# Altium PCB PCB_CONTROL.PcbDoc (part 6 of 15)
Units mil, origin at the board's own origin, x right, y up, seen from the top; angles counter-clockwise.
Board outline 7360.03 x 4773.15 mil, 2 copper layers (Top Layer, Bottom Layer); 73 components, 135 nets, 396 pads, 106 vias.
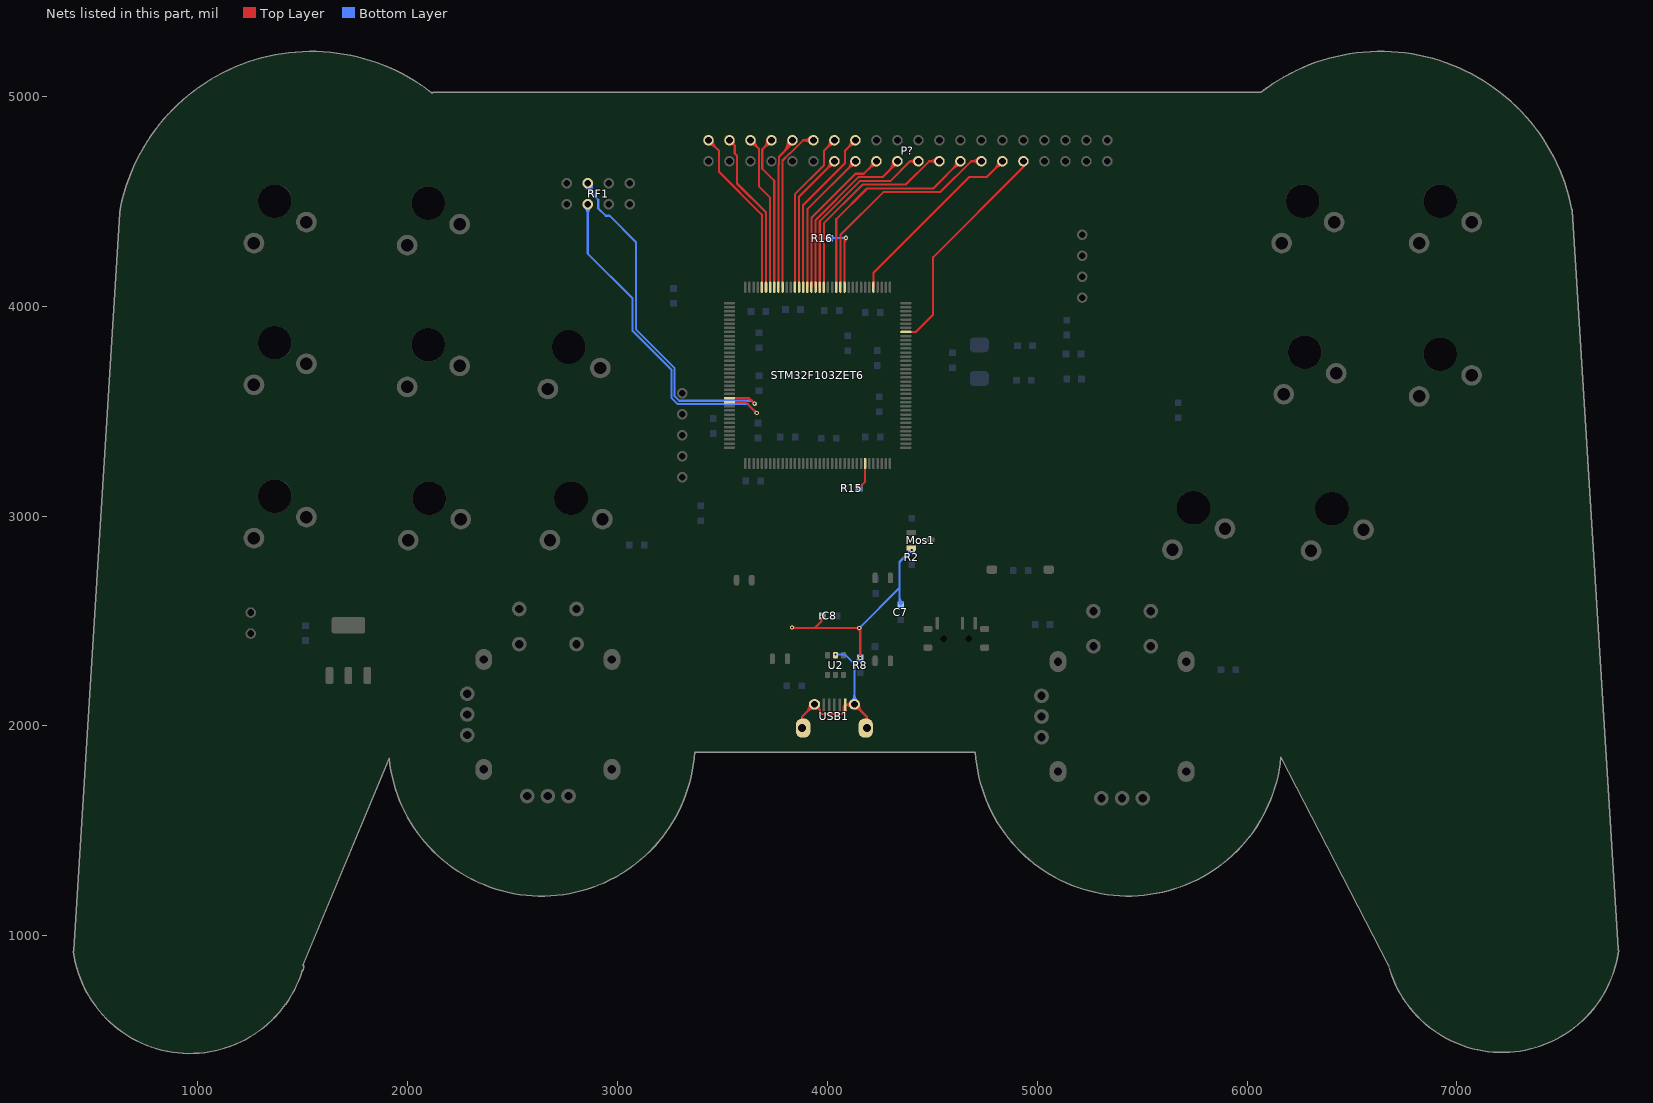
[diagram p6: the nets of this part, all layers, seen from the top]

## Via types
v1: diameter 20, hole 10, Top Layer to Bottom Layer, 104 vias
v2: diameter 30, hole 20, Top Layer to Bottom Layer, 2 vias

## Nets (pads, with @x,y where several pads share a name; then routed paths per layer and width w, separated by ;. In a path a pad name is that pad's centre, name@x,y a point inside that pad or via, vN(x,y) a via of type N, cw(c..) or ccw(c..) an arc to the next point about the centre after c; other vN are vias at no path point) (continued)
BGND: (continued)
  Bottom Layer w10: v1(4040,2340) 4086,2340 4130,2296 ; USB1.0@4130,2103 4130,2296 ; v1(4153,2466) 4345,2658 ; C7.2@4351,2578 4345,2584 4345,2658 ; v1@4043.54,2336.46 cw(c4052.07,2327.93) 4052.07,2340 ; v1@4043.54,2336.46 cw(c4052.07,2327.93) 4052.07,2340 ; v1@4043.54,2336.46 cw(c4052.07,2327.93) 4052.07,2340 ; v1@4043.54,2336.46 cw(c4052.07,2327.93) 4052.07,2340 ; v1@4043.54,2336.46 cw(c4052.07,2327.93) 4052.07,2340 ; v1@4043.54,2336.46 cw(c4052.07,2327.93) 4052.07,2340 ; v1@4043.54,2336.46 cw(c4052.07,2327.93) 4052.07,2340 ; v1@4043.54,2336.46 cw(c4052.07,2327.93) 4052.07,2340 ; v1@4043.54,2336.46 cw(c4052.07,2327.93) 4052.07,2340 ; v1@4043.54,2336.46 cw(c4052.07,2327.93) 4052.07,2340 ; v1@4043.54,2343.54 ccw(c4052.07,2352.07) 4052.07,2340 ; v1@4043.54,2343.54 ccw(c4052.07,2352.07) 4052.07,2340 ; v1@4043.54,2343.54 ccw(c4052.07,2352.07) 4052.07,2340 ; v1@4043.54,2343.54 ccw(c4052.07,2352.07) 4052.07,2340 ; v1@4043.54,2343.54 ccw(c4052.07,2352.07) 4052.07,2340 ; v1@4043.54,2343.54 ccw(c4052.07,2352.07) 4052.07,2340 ; v1@4043.54,2343.54 ccw(c4052.07,2352.07) 4052.07,2340 ; v1@4043.54,2343.54 ccw(c4052.07,2352.07) 4052.07,2340 ; v1@4043.54,2343.54 ccw(c4052.07,2352.07) 4052.07,2340 ; v1@4043.54,2343.54 ccw(c4052.07,2352.07) 4052.07,2340 ; USB1.0@4115.86,2117.14 ccw(c4081.72,2151.28) 4130,2151.28 ; USB1.0@4115.86,2117.14 ccw(c4081.72,2151.28) 4130,2151.28 ; USB1.0@4115.86,2117.14 ccw(c4081.72,2151.28) 4130,2151.28 ; USB1.0@4115.86,2117.14 ccw(c4081.72,2151.28) 4130,2151.28 ; USB1.0@4115.86,2117.14 ccw(c4081.72,2151.28) 4130,2151.28 ; USB1.0@4115.86,2117.14 ccw(c4081.72,2151.28) 4130,2151.28 ; USB1.0@4115.86,2117.14 ccw(c4081.72,2151.28) 4130,2151.28 ; USB1.0@4115.86,2117.14 ccw(c4081.72,2151.28) 4130,2151.28 ; 4130,2151.28 ccw(c4178.28,2151.28) USB1.0@4144.14,2117.14 ; 4130,2151.28 ccw(c4178.28,2151.28) USB1.0@4144.14,2117.14 ; 4130,2151.28 ccw(c4178.28,2151.28) USB1.0@4144.14,2117.14 ; 4130,2151.28 ccw(c4178.28,2151.28) USB1.0@4144.14,2117.14 ; 4130,2151.28 ccw(c4178.28,2151.28) USB1.0@4144.14,2117.14 ; 4130,2151.28 ccw(c4178.28,2151.28) USB1.0@4144.14,2117.14 ; 4130,2151.28 ccw(c4178.28,2151.28) USB1.0@4144.14,2117.14 ; 4130,2151.28 ccw(c4178.28,2151.28) USB1.0@4144.14,2117.14 ; 4130,2296 v1(4158,2324) ; 4130,2296 v1(4158,2324) ; 4130,2296 v1(4158,2324) ; 4130,2296 v1(4158,2324) ; 4139.22,2305.22 cw(c4158,2286.44) R8.2@4158,2313 ; 4139.22,2305.22 ccw(c4120.44,2324) R8.2@4147,2324 ; 4139.22,2305.22 cw(c4158,2286.44) R8.2@4158,2313 ; 4139.22,2305.22 ccw(c4120.44,2324) R8.2@4147,2324 ; 4139.22,2305.22 cw(c4158,2286.44) R8.2@4158,2313 ; 4139.22,2305.22 ccw(c4120.44,2324) R8.2@4147,2324 ; 4139.22,2305.22 cw(c4158,2286.44) R8.2@4158,2313 ; 4139.22,2305.22 ccw(c4120.44,2324) R8.2@4147,2324 ; 4139.22,2305.22 ccw(c4120.44,2324) R8.2@4147,2324 ; 4139.22,2305.22 cw(c4158,2286.44) R8.2@4158,2313 ; 4139.22,2305.22 ccw(c4120.44,2324) R8.2@4147,2324 ; 4139.22,2305.22 cw(c4158,2286.44) R8.2@4158,2313 ; 4139.22,2305.22 ccw(c4120.44,2324) R8.2@4147,2324 ; 4139.22,2305.22 cw(c4158,2286.44) R8.2@4158,2313 ; 4139.22,2305.22 ccw(c4120.44,2324) R8.2@4147,2324 ; 4139.22,2305.22 cw(c4158,2286.44) R8.2@4158,2313 ; 4139.22,2305.22 ccw(c4120.44,2324) R8.2@4147,2324 ; 4139.22,2305.22 cw(c4158,2286.44) R8.2@4158,2313 ; 4139.22,2305.22 ccw(c4120.44,2324) R8.2@4147,2324 ; 4139.22,2305.22 cw(c4158,2286.44) R8.2@4158,2313 ; 4139.22,2305.22 ccw(c4120.44,2324) R8.2@4147,2324 ; 4139.22,2305.22 cw(c4158,2286.44) R8.2@4158,2313 ; 4139.22,2305.22 ccw(c4120.44,2324) R8.2@4147,2324 ; 4139.22,2305.22 cw(c4158,2286.44) R8.2@4158,2313 ; 4139.22,2305.22 ccw(c4120.44,2324) R8.2@4147,2324 ; 4139.22,2305.22 cw(c4158,2286.44) R8.2@4158,2313 ; 4139.22,2305.22 ccw(c4120.44,2324) R8.2@4147,2324 ; 4139.22,2305.22 cw(c4158,2286.44) R8.2@4158,2313 ; 4139.22,2305.22 ccw(c4120.44,2324) R8.2@4147,2324 ; 4139.22,2305.22 cw(c4158,2286.44) R8.2@4158,2313 ; 4139.22,2305.22 ccw(c4120.44,2324) R8.2@4147,2324 ; 4139.22,2305.22 cw(c4158,2286.44) R8.2@4158,2313 ; 4139.22,2305.22 ccw(c4120.44,2324) R8.2@4147,2324 ; 4139.22,2305.22 cw(c4158,2286.44) R8.2@4158,2313 ; 4139.22,2305.22 ccw(c4120.44,2324) R8.2@4147,2324 ; 4139.22,2305.22 cw(c4158,2286.44) R8.2@4158,2313 ; 4139.22,2305.22 ccw(c4120.44,2324) R8.2@4147,2324 ; 4139.22,2305.22 cw(c4158,2286.44) R8.2@4158,2313 ; 4139.22,2305.22 ccw(c4120.44,2324) R8.2@4147,2324 ; 4139.22,2305.22 cw(c4158,2286.44) R8.2@4158,2313 ; 4139.22,2305.22 ccw(c4120.44,2324) R8.2@4147,2324 ; 4139.22,2305.22 cw(c4158,2286.44) R8.2@4158,2313 ; 4139.22,2305.22 ccw(c4120.44,2324) R8.2@4147,2324 ; 4139.22,2305.22 cw(c4158,2286.44) R8.2@4158,2313 ; 4139.22,2305.22 ccw(c4120.44,2324) R8.2@4147,2324 ; 4139.22,2305.22 cw(c4158,2286.44) R8.2@4158,2313 ; 4139.22,2305.22 ccw(c4120.44,2324) R8.2@4147,2324 ; 4139.22,2305.22 cw(c4158,2286.44) R8.2@4158,2313 ; 4139.22,2305.22 ccw(c4120.44,2324) R8.2@4147,2324 ; 4139.22,2305.22 cw(c4158,2286.44) R8.2@4158,2313 ; 4139.22,2305.22 ccw(c4120.44,2324) R8.2@4147,2324 ; 4139.22,2305.22 cw(c4158,2286.44) R8.2@4158,2313 ; 4139.22,2305.22 ccw(c4120.44,2324) R8.2@4147,2324 ; 4139.22,2305.22 cw(c4158,2286.44) R8.2@4158,2313 ; 4139.22,2305.22 ccw(c4120.44,2324) R8.2@4147,2324 ; 4139.22,2305.22 cw(c4158,2286.44) R8.2@4158,2313 ; 4139.22,2305.22 ccw(c4120.44,2324) R8.2@4147,2324 ; 4139.22,2305.22 cw(c4158,2286.44) R8.2@4158,2313 ; 4139.22,2305.22 ccw(c4120.44,2324) R8.2@4147,2324 ; 4139.22,2305.22 cw(c4158,2286.44) R8.2@4158,2313 ; 4139.22,2305.22 ccw(c4120.44,2324) R8.2@4147,2324 ; 4139.22,2305.22 cw(c4158,2286.44) R8.2@4158,2313 ; 4139.22,2305.22 ccw(c4120.44,2324) R8.2@4147,2324 ; 4139.22,2305.22 cw(c4158,2286.44) R8.2@4158,2313 ; R8.2@4149.46,2315.46 cw(c4158,2306.93) R8.2@4158,2319 ; R8.2@4149.46,2315.46 ccw(c4140.93,2324) R8.2@4153,2324 ; R8.2@4149.46,2315.46 cw(c4158,2306.93) R8.2@4158,2319 ; R8.2@4149.46,2315.46 ccw(c4140.93,2324) R8.2@4153,2324 ; R8.2@4149.46,2315.46 cw(c4158,2306.93) R8.2@4158,2319 ; R8.2@4149.46,2315.46 ccw(c4140.93,2324) R8.2@4153,2324 ; R8.2@4149.46,2315.46 cw(c4158,2306.93) R8.2@4158,2319 ; R8.2@4149.46,2315.46 ccw(c4140.93,2324) R8.2@4153,2324 ; R8.2@4149.46,2315.46 ccw(c4140.93,2324) R8.2@4153,2324 ; R8.2@4149.46,2315.46 cw(c4158,2306.93) R8.2@4158,2319 ; R8.2@4149.46,2315.46 ccw(c4140.93,2324) R8.2@4153,2324 ; R8.2@4149.46,2315.46 cw(c4158,2306.93) R8.2@4158,2319 ; R8.2@4149.46,2315.46 ccw(c4140.93,2324) R8.2@4153,2324 ; R8.2@4149.46,2315.46 cw(c4158,2306.93) R8.2@4158,2319 ; R8.2@4149.46,2315.46 ccw(c4140.93,2324) R8.2@4153,2324 ; R8.2@4149.46,2315.46 cw(c4158,2306.93) R8.2@4158,2319 ; R8.2@4149.46,2315.46 ccw(c4140.93,2324) R8.2@4153,2324 ; R8.2@4149.46,2315.46 cw(c4158,2306.93) R8.2@4158,2319 ; R8.2@4149.46,2315.46 ccw(c4140.93,2324) R8.2@4153,2324 ; R8.2@4149.46,2315.46 cw(c4158,2306.93) R8.2@4158,2319 ; R8.2@4149.46,2315.46 ccw(c4140.93,2324) R8.2@4153,2324 ; R8.2@4149.46,2315.46 cw(c4158,2306.93) R8.2@4158,2319 ; R8.2@4149.46,2315.46 ccw(c4140.93,2324) R8.2@4153,2324 ; R8.2@4149.46,2315.46 cw(c4158,2306.93) R8.2@4158,2319 ; R8.2@4149.46,2315.46 ccw(c4140.93,2324) R8.2@4153,2324 ; R8.2@4149.46,2315.46 cw(c4158,2306.93) R8.2@4158,2319 ; R8.2@4149.46,2315.46 ccw(c4140.93,2324) R8.2@4153,2324 ; R8.2@4149.46,2315.46 cw(c4158,2306.93) R8.2@4158,2319 ; R8.2@4149.46,2315.46 ccw(c4140.93,2324) R8.2@4153,2324 ; R8.2@4149.46,2315.46 cw(c4158,2306.93) R8.2@4158,2319 ; R8.2@4149.46,2315.46 ccw(c4140.93,2324) R8.2@4153,2324 ; R8.2@4149.46,2315.46 cw(c4158,2306.93) R8.2@4158,2319 ; R8.2@4149.46,2315.46 ccw(c4140.93,2324) R8.2@4153,2324 ; R8.2@4149.46,2315.46 cw(c4158,2306.93) R8.2@4158,2319 ; R8.2@4149.46,2315.46 ccw(c4140.93,2324) R8.2@4153,2324 ; R8.2@4149.46,2315.46 cw(c4158,2306.93) R8.2@4158,2319 ; R8.2@4149.46,2315.46 ccw(c4140.93,2324) R8.2@4153,2324 ; R8.2@4149.46,2315.46 cw(c4158,2306.93) R8.2@4158,2319 ; R8.2@4149.46,2315.46 ccw(c4140.93,2324) R8.2@4153,2324 ; R8.2@4149.46,2315.46 cw(c4158,2306.93) R8.2@4158,2319 ; R8.2@4149.46,2315.46 ccw(c4140.93,2324) R8.2@4153,2324 ; R8.2@4149.46,2315.46 cw(c4158,2306.93) R8.2@4158,2319 ; R8.2@4149.46,2315.46 ccw(c4140.93,2324) R8.2@4153,2324 ; R8.2@4149.46,2315.46 cw(c4158,2306.93) R8.2@4158,2319 ; R8.2@4149.46,2315.46 ccw(c4140.93,2324) R8.2@4153,2324 ; R8.2@4149.46,2315.46 cw(c4158,2306.93) R8.2@4158,2319 ; R8.2@4149.46,2315.46 ccw(c4140.93,2324) R8.2@4153,2324 ; R8.2@4149.46,2315.46 cw(c4158,2306.93) R8.2@4158,2319 ; R8.2@4149.46,2315.46 ccw(c4140.93,2324) R8.2@4153,2324 ; R8.2@4149.46,2315.46 cw(c4158,2306.93) R8.2@4158,2319 ; R8.2@4149.46,2315.46 ccw(c4140.93,2324) R8.2@4153,2324 ; R8.2@4149.46,2315.46 cw(c4158,2306.93) R8.2@4158,2319 ; R8.2@4149.46,2315.46 ccw(c4140.93,2324) R8.2@4153,2324 ; R8.2@4149.46,2315.46 cw(c4158,2306.93) R8.2@4158,2319 ; R8.2@4149.46,2315.46 ccw(c4140.93,2324) R8.2@4153,2324 ; R8.2@4149.46,2315.46 cw(c4158,2306.93) R8.2@4158,2319 ; R8.2@4149.46,2315.46 ccw(c4140.93,2324) R8.2@4153,2324 ; R8.2@4149.46,2315.46 cw(c4158,2306.93) R8.2@4158,2319 ; R8.2@4149.46,2315.46 ccw(c4140.93,2324) R8.2@4153,2324 ; R8.2@4149.46,2315.46 cw(c4158,2306.93) R8.2@4158,2319 ; R8.2@4149.46,2315.46 ccw(c4140.93,2324) R8.2@4153,2324 ; R8.2@4149.46,2315.46 cw(c4158,2306.93) R8.2@4158,2319 ; R8.2@4149.46,2315.46 ccw(c4140.93,2324) R8.2@4153,2324 ; R8.2@4149.46,2315.46 cw(c4158,2306.93) R8.2@4158,2319 ; R8.2@4149.46,2315.46 ccw(c4140.93,2324) R8.2@4153,2324 ; R8.2@4149.46,2315.46 cw(c4158,2306.93) R8.2@4158,2319 ; R8.2@4149.46,2315.46 ccw(c4140.93,2324) R8.2@4153,2324 ; R8.2@4149.46,2315.46 cw(c4158,2306.93) R8.2@4158,2319 ; R8.2@4149.46,2315.46 ccw(c4140.93,2324) R8.2@4153,2324 ; R8.2@4149.46,2315.46 cw(c4158,2306.93) R8.2@4158,2319 ; R8.2@4149.46,2315.46 ccw(c4140.93,2324) R8.2@4153,2324 ; R8.2@4149.46,2315.46 cw(c4158,2306.93) R8.2@4158,2319 ; v1@4153,2471 ccw(c4153,2483.07) 4161.54,2474.54 ; v1@4153,2471 ccw(c4153,2483.07) 4161.54,2474.54 ; v1@4153,2471 ccw(c4153,2483.07) 4161.54,2474.54 ; v1@4153,2471 ccw(c4153,2483.07) 4161.54,2474.54 ; v1@4153,2471 ccw(c4153,2483.07) 4161.54,2474.54 ; v1@4153,2471 ccw(c4153,2483.07) 4161.54,2474.54 ; v1@4153,2471 ccw(c4153,2483.07) 4161.54,2474.54 ; v1@4153,2471 ccw(c4153,2483.07) 4161.54,2474.54 ; v1@4153,2471 ccw(c4153,2483.07) 4161.54,2474.54 ; v1@4153,2471 ccw(c4153,2483.07) 4161.54,2474.54 ; v1@4158,2466 cw(c4170.07,2466) 4161.54,2474.54 ; v1@4158,2466 cw(c4170.07,2466) 4161.54,2474.54 ; v1@4158,2466 cw(c4170.07,2466) 4161.54,2474.54 ; v1@4158,2466 cw(c4170.07,2466) 4161.54,2474.54 ; v1@4158,2466 cw(c4170.07,2466) 4161.54,2474.54 ; v1@4158,2466 cw(c4170.07,2466) 4161.54,2474.54 ; v1@4158,2466 cw(c4170.07,2466) 4161.54,2474.54 ; v1@4158,2466 cw(c4170.07,2466) 4161.54,2474.54 ; v1@4158,2466 cw(c4170.07,2466) 4161.54,2474.54 ; v1@4158,2466 cw(c4170.07,2466) 4161.54,2474.54 ; 4345,2594.9 ccw(c4367.9,2594.9) C7.2@4351.71,2578.71 ; 4345,2594.9 ccw(c4367.9,2594.9) C7.2@4351.71,2578.71 ; 4345,2594.9 ccw(c4367.9,2594.9) C7.2@4351.71,2578.71 ; 4345,2594.9 ccw(c4367.9,2594.9) C7.2@4351.71,2578.71 ; 4345,2619.04 ccw(c4392.04,2619.04) C7.2@4358.78,2585.78 ; 4345,2619.04 ccw(c4392.04,2619.04) C7.2@4358.78,2585.78 ; 4345,2619.04 ccw(c4392.04,2619.04) C7.2@4358.78,2585.78 ; 4345,2619.04 ccw(c4392.04,2619.04) C7.2@4358.78,2585.78 ; 4345,2658 4345,2781 v1(4403,2839) ; 4371.79,2807.79 v1(4403,2839) ; 4371.79,2807.79 v1(4403,2839) ; 4371.79,2807.79 v1(4403,2839) ; 4384.22,2820.22 cw(c4403,2801.44) R2.2@4403,2828 ; 4384.22,2820.22 ccw(c4365.44,2839) R2.2@4392,2839 ; 4384.22,2820.22 cw(c4403,2801.44) R2.2@4403,2828 ; 4384.22,2820.22 ccw(c4365.44,2839) R2.2@4392,2839 ; 4384.22,2820.22 cw(c4403,2801.44) R2.2@4403,2828 ; 4384.22,2820.22 ccw(c4365.44,2839) R2.2@4392,2839 ; 4384.22,2820.22 cw(c4403,2801.44) R2.2@4403,2828 ; 4384.22,2820.22 ccw(c4365.44,2839) R2.2@4392,2839 ; 4384.22,2820.22 ccw(c4365.44,2839) R2.2@4392,2839 ; 4384.22,2820.22 cw(c4403,2801.44) R2.2@4403,2828 ; 4384.22,2820.22 ccw(c4365.44,2839) R2.2@4392,2839 ; 4384.22,2820.22 cw(c4403,2801.44) R2.2@4403,2828 ; 4384.22,2820.22 ccw(c4365.44,2839) R2.2@4392,2839 ; 4384.22,2820.22 cw(c4403,2801.44) R2.2@4403,2828 ; 4384.22,2820.22 ccw(c4365.44,2839) R2.2@4392,2839 ; 4384.22,2820.22 cw(c4403,2801.44) R2.2@4403,2828 ; 4384.22,2820.22 ccw(c4365.44,2839) R2.2@4392,2839 ; 4384.22,2820.22 cw(c4403,2801.44) R2.2@4403,2828 ; 4384.22,2820.22 ccw(c4365.44,2839) R2.2@4392,2839 ; 4384.22,2820.22 cw(c4403,2801.44) R2.2@4403,2828 ; 4384.22,2820.22 ccw(c4365.44,2839) R2.2@4392,2839 ; 4384.22,2820.22 cw(c4403,2801.44) R2.2@4403,2828 ; 4384.22,2820.22 ccw(c4365.44,2839) R2.2@4392,2839 ; 4384.22,2820.22 cw(c4403,2801.44) R2.2@4403,2828 ; 4384.22,2820.22 ccw(c4365.44,2839) R2.2@4392,2839 ; 4384.22,2820.22 cw(c4403,2801.44) R2.2@4403,2828 ; 4384.22,2820.22 ccw(c4365.44,2839) R2.2@4392,2839 ; 4384.22,2820.22 cw(c4403,2801.44) R2.2@4403,2828 ; 4384.22,2820.22 ccw(c4365.44,2839) R2.2@4392,2839 ; 4384.22,2820.22 cw(c4403,2801.44) R2.2@4403,2828 ; 4384.22,2820.22 ccw(c4365.44,2839) R2.2@4392,2839 ; 4384.22,2820.22 cw(c4403,2801.44) R2.2@4403,2828 ; 4384.22,2820.22 ccw(c4365.44,2839) R2.2@4392,2839 ; 4384.22,2820.22 cw(c4403,2801.44) R2.2@4403,2828 ; 4384.22,2820.22 ccw(c4365.44,2839) R2.2@4392,2839 ; 4384.22,2820.22 cw(c4403,2801.44) R2.2@4403,2828 ; 4384.22,2820.22 ccw(c4365.44,2839) R2.2@4392,2839 ; 4384.22,2820.22 cw(c4403,2801.44) R2.2@4403,2828 ; 4384.22,2820.22 ccw(c4365.44,2839) R2.2@4392,2839 ; 4384.22,2820.22 cw(c4403,2801.44) R2.2@4403,2828 ; 4384.22,2820.22 ccw(c4365.44,2839) R2.2@4392,2839 ; 4384.22,2820.22 cw(c4403,2801.44) R2.2@4403,2828 ; 4384.22,2820.22 ccw(c4365.44,2839) R2.2@4392,2839 ; 4384.22,2820.22 cw(c4403,2801.44) R2.2@4403,2828 ; 4384.22,2820.22 ccw(c4365.44,2839) R2.2@4392,2839 ; 4384.22,2820.22 cw(c4403,2801.44) R2.2@4403,2828 ; 4384.22,2820.22 ccw(c4365.44,2839) R2.2@4392,2839 ; 4384.22,2820.22 cw(c4403,2801.44) R2.2@4403,2828 ; 4384.22,2820.22 ccw(c4365.44,2839) R2.2@4392,2839 ; 4384.22,2820.22 cw(c4403,2801.44) R2.2@4403,2828 ; 4384.22,2820.22 ccw(c4365.44,2839) R2.2@4392,2839 ; 4384.22,2820.22 cw(c4403,2801.44) R2.2@4403,2828 ; 4384.22,2820.22 ccw(c4365.44,2839) R2.2@4392,2839 ; 4384.22,2820.22 cw(c4403,2801.44) R2.2@4403,2828 ; 4384.22,2820.22 ccw(c4365.44,2839) R2.2@4392,2839 ; 4384.22,2820.22 cw(c4403,2801.44) R2.2@4403,2828 ; 4384.22,2820.22 ccw(c4365.44,2839) R2.2@4392,2839 ; 4384.22,2820.22 cw(c4403,2801.44) R2.2@4403,2828 ; 4384.22,2820.22 ccw(c4365.44,2839) R2.2@4392,2839 ; 4384.22,2820.22 cw(c4403,2801.44) R2.2@4403,2828 ; 4384.22,2820.22 ccw(c4365.44,2839) R2.2@4392,2839 ; 4384.22,2820.22 cw(c4403,2801.44) R2.2@4403,2828 ; 4384.22,2820.22 ccw(c4365.44,2839) R2.2@4392,2839 ; 4384.22,2820.22 cw(c4403,2801.44) R2.2@4403,2828 ; R2.2@4394.46,2830.46 cw(c4403,2821.93) R2.2@4403,2834 ; R2.2@4394.46,2830.46 ccw(c4385.93,2839) R2.2@4398,2839 ; R2.2@4394.46,2830.46 cw(c4403,2821.93) R2.2@4403,2834 ; R2.2@4394.46,2830.46 ccw(c4385.93,2839) R2.2@4398,2839 ; R2.2@4394.46,2830.46 cw(c4403,2821.93) R2.2@4403,2834 ; R2.2@4394.46,2830.46 ccw(c4385.93,2839) R2.2@4398,2839 ; R2.2@4394.46,2830.46 cw(c4403,2821.93) R2.2@4403,2834 ; R2.2@4394.46,2830.46 ccw(c4385.93,2839) R2.2@4398,2839 ; R2.2@4394.46,2830.46 ccw(c4385.93,2839) R2.2@4398,2839 ; R2.2@4394.46,2830.46 cw(c4403,2821.93) R2.2@4403,2834 ; R2.2@4394.46,2830.46 ccw(c4385.93,2839) R2.2@4398,2839 ; R2.2@4394.46,2830.46 cw(c4403,2821.93) R2.2@4403,2834 ; R2.2@4394.46,2830.46 ccw(c4385.93,2839) R2.2@4398,2839 ; R2.2@4394.46,2830.46 cw(c4403,2821.93) R2.2@4403,2834 ; R2.2@4394.46,2830.46 ccw(c4385.93,2839) R2.2@4398,2839 ; R2.2@4394.46,2830.46 cw(c4403,2821.93) R2.2@4403,2834 ; R2.2@4394.46,2830.46 ccw(c4385.93,2839) R2.2@4398,2839 ; R2.2@4394.46,2830.46 cw(c4403,2821.93) R2.2@4403,2834 ; R2.2@4394.46,2830.46 ccw(c4385.93,2839) R2.2@4398,2839 ; R2.2@4394.46,2830.46 cw(c4403,2821.93) R2.2@4403,2834 ; R2.2@4394.46,2830.46 ccw(c4385.93,2839) R2.2@4398,2839 ; R2.2@4394.46,2830.46 cw(c4403,2821.93) R2.2@4403,2834 ; R2.2@4394.46,2830.46 ccw(c4385.93,2839) R2.2@4398,2839 ; R2.2@4394.46,2830.46 cw(c4403,2821.93) R2.2@4403,2834 ; R2.2@4394.46,2830.46 ccw(c4385.93,2839) R2.2@4398,2839 ; R2.2@4394.46,2830.46 cw(c4403,2821.93) R2.2@4403,2834 ; R2.2@4394.46,2830.46 ccw(c4385.93,2839) R2.2@4398,2839 ; R2.2@4394.46,2830.46 cw(c4403,2821.93) R2.2@4403,2834 ; R2.2@4394.46,2830.46 ccw(c4385.93,2839) R2.2@4398,2839 ; R2.2@4394.46,2830.46 cw(c4403,2821.93) R2.2@4403,2834 ; R2.2@4394.46,2830.46 ccw(c4385.93,2839) R2.2@4398,2839 ; R2.2@4394.46,2830.46 cw(c4403,2821.93) R2.2@4403,2834 ; R2.2@4394.46,2830.46 ccw(c4385.93,2839) R2.2@4398,2839 ; R2.2@4394.46,2830.46 cw(c4403,2821.93) R2.2@4403,2834 ; R2.2@4394.46,2830.46 ccw(c4385.93,2839) R2.2@4398,2839 ; R2.2@4394.46,2830.46 cw(c4403,2821.93) R2.2@4403,2834 ; R2.2@4394.46,2830.46 ccw(c4385.93,2839) R2.2@4398,2839 ; R2.2@4394.46,2830.46 cw(c4403,2821.93) R2.2@4403,2834 ; R2.2@4394.46,2830.46 ccw(c4385.93,2839) R2.2@4398,2839 ; R2.2@4394.46,2830.46 cw(c4403,2821.93) R2.2@4403,2834 ; R2.2@4394.46,2830.46 ccw(c4385.93,2839) R2.2@4398,2839 ; R2.2@4394.46,2830.46 cw(c4403,2821.93) R2.2@4403,2834 ; R2.2@4394.46,2830.46 ccw(c4385.93,2839) R2.2@4398,2839 ; R2.2@4394.46,2830.46 cw(c4403,2821.93) R2.2@4403,2834 ; R2.2@4394.46,2830.46 ccw(c4385.93,2839) R2.2@4398,2839 ; R2.2@4394.46,2830.46 cw(c4403,2821.93) R2.2@4403,2834 ; R2.2@4394.46,2830.46 ccw(c4385.93,2839) R2.2@4398,2839 ; R2.2@4394.46,2830.46 cw(c4403,2821.93) R2.2@4403,2834 ; R2.2@4394.46,2830.46 ccw(c4385.93,2839) R2.2@4398,2839 ; R2.2@4394.46,2830.46 cw(c4403,2821.93) R2.2@4403,2834 ; R2.2@4394.46,2830.46 ccw(c4385.93,2839) R2.2@4398,2839 ; R2.2@4394.46,2830.46 cw(c4403,2821.93) R2.2@4403,2834 ; R2.2@4394.46,2830.46 ccw(c4385.93,2839) R2.2@4398,2839 ; R2.2@4394.46,2830.46 cw(c4403,2821.93) R2.2@4403,2834 ; R2.2@4394.46,2830.46 ccw(c4385.93,2839) R2.2@4398,2839 ; R2.2@4394.46,2830.46 cw(c4403,2821.93) R2.2@4403,2834 ; R2.2@4394.46,2830.46 ccw(c4385.93,2839) R2.2@4398,2839 ; R2.2@4394.46,2830.46 cw(c4403,2821.93) R2.2@4403,2834 ; R2.2@4394.46,2830.46 ccw(c4385.93,2839) R2.2@4398,2839 ; R2.2@4394.46,2830.46 cw(c4403,2821.93) R2.2@4403,2834 ; R2.2@4394.46,2830.46 ccw(c4385.93,2839) R2.2@4398,2839 ; R2.2@4394.46,2830.46 cw(c4403,2821.93) R2.2@4403,2834 ; R2.2@4394.46,2830.46 ccw(c4385.93,2839) R2.2@4398,2839 ; R2.2@4394.46,2830.46 cw(c4403,2821.93) R2.2@4403,2834 ; R2.2@4394.46,2830.46 ccw(c4385.93,2839) R2.2@4398,2839 ; R2.2@4394.46,2830.46 cw(c4403,2821.93) R2.2@4403,2834 ; R2.2@4394.46,2830.46 ccw(c4385.93,2839) R2.2@4398,2839 ; R2.2@4394.46,2830.46 cw(c4403,2821.93) R2.2@4403,2834 ; R2.2@4394.46,2830.46 ccw(c4385.93,2839) R2.2@4398,2839 ; R2.2@4394.46,2830.46 cw(c4403,2821.93) R2.2@4403,2834 ; R2.2@4394.46,2830.46 ccw(c4385.93,2839) R2.2@4398,2839 ; R2.2@4394.46,2830.46 cw(c4403,2821.93) R2.2@4403,2834
BOOT0: R15.1 STM32F103ZET6.138 | length 426.8
  Top Layer w10: v1(4152,3133) 4181.38,3162.38 STM32F103ZET6.138@4181.38,3250 ; v1@4152,3138 ccw(c4152,3150.07) 4160.54,3141.54 ; v1@4152,3138 ccw(c4152,3150.07) 4160.54,3141.54 ; v1@4152,3138 ccw(c4152,3150.07) 4160.54,3141.54 ; v1@4152,3138 ccw(c4152,3150.07) 4160.54,3141.54 ; v1@4152,3138 ccw(c4152,3150.07) 4160.54,3141.54 ; v1@4152,3138 ccw(c4152,3150.07) 4160.54,3141.54 ; v1@4152,3138 ccw(c4152,3150.07) 4160.54,3141.54 ; v1@4152,3138 ccw(c4152,3150.07) 4160.54,3141.54 ; v1@4152,3138 ccw(c4152,3150.07) 4160.54,3141.54 ; v1@4152,3138 ccw(c4152,3150.07) 4160.54,3141.54 ; v1@4157,3133 cw(c4169.07,3133) 4160.54,3141.54 ; v1@4157,3133 cw(c4169.07,3133) 4160.54,3141.54 ; v1@4157,3133 cw(c4169.07,3133) 4160.54,3141.54 ; v1@4157,3133 cw(c4169.07,3133) 4160.54,3141.54 ; v1@4157,3133 cw(c4169.07,3133) 4160.54,3141.54 ; v1@4157,3133 cw(c4169.07,3133) 4160.54,3141.54 ; v1@4157,3133 cw(c4169.07,3133) 4160.54,3141.54 ; v1@4157,3133 cw(c4169.07,3133) 4160.54,3141.54 ; v1@4157,3133 cw(c4169.07,3133) 4160.54,3141.54 ; v1@4157,3133 cw(c4169.07,3133) 4160.54,3141.54 ; 4181.38,3193 STM32F103ZET6.138@4181.38,3229 ; 4181.38,3193 STM32F103ZET6.138@4181.38,3229 ; 4181.38,3193 STM32F103ZET6.138@4181.38,3229
BOOT1: R16.1 STM32F103ZET6.48 | length 766.2
  Top Layer w10: STM32F103ZET6.48@4082.95,4090 4082.95,4317.95 v1(4090,4325) ; 4082.95,4295.91 cw(c4119.09,4295.91) v1@4093.54,4321.46 ; 4082.95,4295.91 cw(c4119.09,4295.91) v1@4093.54,4321.46 ; 4082.95,4295.91 cw(c4119.09,4295.91) v1@4093.54,4321.46 ; 4082.95,4295.91 cw(c4119.09,4295.91) v1@4093.54,4321.46 ; 4085.58,4307.68 ccw(c4072.61,4315.17) v1@4085.65,4322.54 ; 4085.58,4307.68 ccw(c4072.61,4315.17) v1@4085.65,4322.54 ; 4085.58,4307.68 ccw(c4072.61,4315.17) v1@4085.65,4322.54 ; 4085.58,4307.68 ccw(c4072.61,4315.17) v1@4085.65,4322.54 ; 4085.58,4307.68 ccw(c4072.61,4315.17) v1@4085.65,4322.54 ; 4085.58,4307.68 ccw(c4072.61,4315.17) v1@4085.65,4322.54
  Bottom Layer w10: R16.1@4012,4323 4014,4325 v1(4090,4325) ; R16.1@4019.78,4315.22 cw(c4043.38,4291.62) 4043.38,4325 ; R16.1@4019.78,4315.22 cw(c4043.38,4291.62) 4043.38,4325 ; R16.1@4019.78,4315.22 cw(c4043.38,4291.62) 4043.38,4325 ; R16.1@4019.78,4315.22 cw(c4043.38,4291.62) 4043.38,4325 ; R16.1@4019.78,4330.78 ccw(c4033.73,4344.73) 4033.73,4325 ; R16.1@4019.78,4330.78 ccw(c4033.73,4344.73) 4033.73,4325 ; R16.1@4019.78,4330.78 ccw(c4033.73,4344.73) 4033.73,4325 ; R16.1@4019.78,4330.78 ccw(c4033.73,4344.73) 4033.73,4325 ; 4077.93,4325 cw(c4077.93,4312.93) v1@4086.46,4321.46 ; 4077.93,4325 ccw(c4077.93,4337.07) v1@4086.46,4328.54 ; 4077.93,4325 ccw(c4077.93,4337.07) v1@4086.46,4328.54 ; 4077.93,4325 cw(c4077.93,4312.93) v1@4086.46,4321.46 ; 4077.93,4325 ccw(c4077.93,4337.07) v1@4086.46,4328.54 ; 4077.93,4325 cw(c4077.93,4312.93) v1@4086.46,4321.46 ; 4077.93,4325 ccw(c4077.93,4337.07) v1@4086.46,4328.54 ; 4077.93,4325 cw(c4077.93,4312.93) v1@4086.46,4321.46
CE: RF1.3 STM32F103ZET6.97 | length 2130.5
  Top Layer w10: STM32F103ZET6.97@3535,3542.05 3612.95,3542.05 v1(3665,3490) ; 3656.46,3498.54 cw(c3647.93,3490) v1@3660,3490 ; 3656.46,3498.54 ccw(c3665,3507.07) v1@3665,3495 ; 3656.46,3498.54 ccw(c3665,3507.07) v1@3665,3495 ; 3656.46,3498.54 cw(c3647.93,3490) v1@3660,3490 ; 3656.46,3498.54 ccw(c3665,3507.07) v1@3665,3495 ; 3656.46,3498.54 cw(c3647.93,3490) v1@3660,3490 ; 3656.46,3498.54 ccw(c3665,3507.07) v1@3665,3495 ; 3656.46,3498.54 cw(c3647.93,3490) v1@3660,3490
  Bottom Layer w10: RF1.3@2860,4485 2860,4250 3073,4037 3073,3882.6 3258,3697.6 3258,3563.46 3288.46,3533 3622,3533 v1(3665,3490) ; RF1.3@2845.86,4470.86 cw(c2811.72,4436.72) 2860,4436.72 ; RF1.3@2845.86,4470.86 cw(c2811.72,4436.72) 2860,4436.72 ; RF1.3@2845.86,4470.86 cw(c2811.72,4436.72) 2860,4436.72 ; RF1.3@2845.86,4470.86 cw(c2811.72,4436.72) 2860,4436.72 ; 2860,4436.72 cw(c2908.28,4436.72) RF1.3@2874.14,4470.86 ; 2860,4436.72 cw(c2908.28,4436.72) RF1.3@2874.14,4470.86 ; 2860,4436.72 cw(c2908.28,4436.72) RF1.3@2874.14,4470.86 ; 2860,4436.72 cw(c2908.28,4436.72) RF1.3@2874.14,4470.86 ; 3656.46,3498.54 cw(c3647.93,3490) v1@3660,3490 ; 3656.46,3498.54 ccw(c3665,3507.07) v1@3665,3495 ; 3656.46,3498.54 ccw(c3665,3507.07) v1@3665,3495 ; 3656.46,3498.54 cw(c3647.93,3490) v1@3660,3490 ; 3656.46,3498.54 ccw(c3665,3507.07) v1@3665,3495 ; 3656.46,3498.54 cw(c3647.93,3490) v1@3660,3490 ; 3656.46,3498.54 ccw(c3665,3507.07) v1@3665,3495 ; 3656.46,3498.54 cw(c3647.93,3490) v1@3660,3490
CS: P?.29 STM32F103ZET6.41 | length 1671.1
  Top Layer w10: STM32F103ZET6.41@4220.75,4090 4220.75,4159.25 4676.5,4615 4760,4615 P?.29@4835,4690 ; 4800.86,4655.86 cw(c4835,4621.72) P?.29@4835,4670 ; 4800.86,4655.86 ccw(c4766.72,4690) P?.29@4815,4690 ; 4800.86,4655.86 ccw(c4766.72,4690) P?.29@4815,4690 ; 4800.86,4655.86 cw(c4835,4621.72) P?.29@4835,4670 ; 4800.86,4655.86 ccw(c4766.72,4690) P?.29@4815,4690 ; 4800.86,4655.86 cw(c4835,4621.72) P?.29@4835,4670 ; 4800.86,4655.86 ccw(c4766.72,4690) P?.29@4815,4690 ; 4800.86,4655.86 cw(c4835,4621.72) P?.29@4835,4670 ; 4808.25,4664.8 cw(c4842.01,4655.76) P?.29@4835,4690 ; 4808.25,4664.8 cw(c4842.01,4655.76) P?.29@4835,4690 ; 4808.25,4664.8 cw(c4842.01,4655.76) P?.29@4835,4690 ; 4808.25,4664.8 cw(c4842.01,4655.76) P?.29@4835,4690 ; 4808.25,4664.8 cw(c4842.01,4655.76) P?.29@4835,4690 ; 4808.25,4664.8 cw(c4842.01,4655.76) P?.29@4835,4690 ; 4809.8,4663.25 ccw(c4800.76,4697.01) P?.29@4835,4690 ; 4809.8,4663.25 ccw(c4800.76,4697.01) P?.29@4835,4690 ; 4809.8,4663.25 ccw(c4800.76,4697.01) P?.29@4835,4690 ; 4809.8,4663.25 ccw(c4800.76,4697.01) P?.29@4835,4690 ; 4809.8,4663.25 ccw(c4800.76,4697.01) P?.29@4835,4690 ; 4809.8,4663.25 ccw(c4800.76,4697.01) P?.29@4835,4690
CSN: RF1.4 STM32F103ZET6.96 | length 2917.4
  Top Layer w10: STM32F103ZET6.96@3535,3561.73 3628.27,3561.73 v1(3655,3535) ; 3646.46,3543.54 cw(c3637.93,3535) v1@3650,3535 ; 3646.46,3543.54 ccw(c3655,3552.07) v1@3655,3540 ; 3646.46,3543.54 ccw(c3655,3552.07) v1@3655,3540 ; 3646.46,3543.54 cw(c3637.93,3535) v1@3650,3535 ; 3646.46,3543.54 ccw(c3655,3552.07) v1@3655,3540 ; 3646.46,3543.54 cw(c3637.93,3535) v1@3650,3535 ; 3646.46,3543.54 ccw(c3655,3552.07) v1@3655,3540 ; 3646.46,3543.54 cw(c3637.93,3535) v1@3650,3535
  Bottom Layer w10: v1(3655,3535) 3641,3549 3295.09,3549 3274,3570.09 3274,3704.23 3089,3889.23 3089,4305.09 2964.09,4430 2945,4430 2910,4465 2910,4507 2896,4521 ; RF1.4@2850.29,4587.38 ccw(c2879.78,4580.16) 2858.31,4558.69 ; RF1.4@2850.29,4587.38 ccw(c2879.78,4580.16) 2858.31,4558.69 ; RF1.4@2850.29,4587.38 ccw(c2879.78,4580.16) 2858.31,4558.69 ; RF1.4@2853.51,4566.08 cw(c2850.4,4557) 2860,4557 ; RF1.4@2853.51,4566.08 cw(c2850.4,4557) 2860,4557 ; RF1.4@2853.51,4566.08 cw(c2850.4,4557) 2860,4557 ; RF1.4@2853.51,4566.08 cw(c2850.4,4557) 2860,4557 ; 2860,4557 cw(c2869.6,4557) RF1.4@2866.49,4566.08 ; 2860,4557 cw(c2869.6,4557) RF1.4@2866.49,4566.08 ; 2860,4557 cw(c2869.6,4557) RF1.4@2866.49,4566.08 ; 2860,4557 cw(c2869.6,4557) RF1.4@2866.49,4566.08 ; 2860,4557 RF1.4@2860,4585 ; RF1.4@2860,4585 cw(c2837.2,4561.18) 2870.17,4561.9 ; RF1.4@2860,4585 cw(c2837.2,4561.18) 2870.17,4561.9 ; RF1.4@2860,4585 cw(c2837.2,4561.18) 2870.17,4561.9 ; RF1.4@2860,4585 ccw(c2899.97,4575.22) 2870.87,4546.13 ; RF1.4@2860,4585 cw(c2837.2,4561.18) 2870.17,4561.9 ; RF1.4@2860,4585 ccw(c2899.97,4575.22) 2870.87,4546.13 ; RF1.4@2860,4585 cw(c2837.2,4561.18) 2870.17,4561.9 ; RF1.4@2860,4585 cw(c2837.2,4561.18) 2870.17,4561.9 ; RF1.4@2860,4585 ccw(c2899.97,4575.22) 2870.87,4546.13 ; RF1.4@2866.91,4592.22 cw(c2838,4562.02) 2879.81,4562.93 ; RF1.4@2866.91,4592.22 cw(c2838,4562.02) 2879.81,4562.93 ; RF1.4@2866.91,4592.22 cw(c2838,4562.02) 2879.81,4562.93 ; RF1.4@2866.91,4592.22 cw(c2838,4562.02) 2879.81,4562.93 ; RF1.4@2866.91,4592.22 cw(c2838,4562.02) 2879.81,4562.93 ; RF1.4@2866.91,4592.22 cw(c2838,4562.02) 2879.81,4562.93 ; RF1.4@2869.71,4582.62 ccw(c2920.15,4570.28) 2883.44,4533.56 ; RF1.4@2869.71,4582.62 ccw(c2920.15,4570.28) 2883.44,4533.56 ; RF1.4@2869.71,4582.62 ccw(c2920.15,4570.28) 2883.44,4533.56 ; 2870.2,4560.25 cw(c2885.5,4560.59) RF1.4@2874.45,4571.17 ; 2870.2,4560.25 cw(c2885.5,4560.59) RF1.4@2874.45,4571.17 ; 2870.2,4560.25 cw(c2885.5,4560.59) RF1.4@2874.45,4571.17 ; 2870.2,4560.25 cw(c2885.5,4560.59) RF1.4@2874.45,4571.17 ; 2870.2,4560.25 cw(c2885.5,4560.59) RF1.4@2874.45,4571.17 ; 2870.2,4560.25 cw(c2885.5,4560.59) RF1.4@2874.45,4571.17 ; RF1.4@2879.43,4580.25 ccw(c2940.34,4565.35) 2896,4521 ; RF1.4@2879.43,4580.25 ccw(c2940.34,4565.35) 2896,4521 ; RF1.4@2879.43,4580.25 ccw(c2940.34,4565.35) 2896,4521 ; 3646.46,3543.54 cw(c3637.93,3535) v1@3650,3535 ; 3646.46,3543.54 ccw(c3655,3552.07) v1@3655,3540 ; 3646.46,3543.54 ccw(c3655,3552.07) v1@3655,3540 ; 3646.46,3543.54 cw(c3637.93,3535) v1@3650,3535 ; 3646.46,3543.54 ccw(c3655,3552.07) v1@3655,3540 ; 3646.46,3543.54 cw(c3637.93,3535) v1@3650,3535 ; 3646.46,3543.54 ccw(c3655,3552.07) v1@3655,3540 ; 3646.46,3543.54 cw(c3637.93,3535) v1@3650,3535
DB0: P?.2 STM32F103ZET6.68 | length 1573
  Top Layer w10: STM32F103ZET6.68@3689.25,4090 3689.25,4435.75 3485,4640 3485,4740 P?.2@3435,4790 ; P?.2@3435,4770 cw(c3435,4721.72) 3469.14,4755.86 ; P?.2@3435,4770 cw(c3435,4721.72) 3469.14,4755.86 ; P?.2@3435,4770 cw(c3435,4721.72) 3469.14,4755.86 ; P?.2@3435,4770 cw(c3435,4721.72) 3469.14,4755.86 ; P?.2@3435,4790 ccw(c3469.24,4797.01) 3460.2,4763.25 ; P?.2@3435,4790 ccw(c3469.24,4797.01) 3460.2,4763.25 ; P?.2@3435,4790 ccw(c3469.24,4797.01) 3460.2,4763.25 ; P?.2@3435,4790 cw(c3427.99,4755.76) 3461.75,4764.8 ; P?.2@3435,4790 cw(c3427.99,4755.76) 3461.75,4764.8 ; P?.2@3435,4790 cw(c3427.99,4755.76) 3461.75,4764.8 ; P?.2@3435,4790 cw(c3427.99,4755.76) 3461.75,4764.8 ; P?.2@3435,4790 ccw(c3469.24,4797.01) 3460.2,4763.25 ; P?.2@3435,4790 cw(c3427.99,4755.76) 3461.75,4764.8 ; P?.2@3435,4790 cw(c3427.99,4755.76) 3461.75,4764.8 ; P?.2@3435,4790 ccw(c3469.24,4797.01) 3460.2,4763.25 ; P?.2@3435,4790 ccw(c3469.24,4797.01) 3460.2,4763.25 ; P?.2@3455,4790 ccw(c3503.28,4790) 3469.14,4755.86 ; P?.2@3455,4790 ccw(c3503.28,4790) 3469.14,4755.86 ; P?.2@3455,4790 ccw(c3503.28,4790) 3469.14,4755.86 ; P?.2@3455,4790 ccw(c3503.28,4790) 3469.14,4755.86
DB1: P?.4 STM32F103ZET6.67 | length 947.1
  Top Layer w10: P?.4@3535,4790 3560,4765 ; STM32F103ZET6.67@3708.94,4090 3708.94,4446.06 3571,4584 3571,4715.91 3560,4726.91 3560,4765 ; P?.4@3539.84,4770.59 cw(c3544.97,4749.98) 3560,4765 ; P?.4@3539.84,4770.59 cw(c3544.97,4749.98) 3560,4765 ; P?.4@3539.84,4770.59 cw(c3544.97,4749.98) 3560,4765 ; P?.4@3539.84,4770.59 cw(c3544.97,4749.98) 3560,4765 ; P?.4@3554.41,4785.16 ccw(c3575.02,4780.03) 3560,4765 ; P?.4@3554.41,4785.16 ccw(c3575.02,4780.03) 3560,4765 ; P?.4@3554.41,4785.16 ccw(c3575.02,4780.03) 3560,4765 ; P?.4@3554.41,4785.16 ccw(c3575.02,4780.03) 3560,4765
DB2: P?.6 STM32F103ZET6.66 | length 1506.5
  Top Layer w10: STM32F103ZET6.66@3728.62,4090 3728.62,4516.38 3675,4570 3675,4750 P?.6@3635,4790 ; P?.6@3635,4770 cw(c3635,4721.72) 3669.14,4755.86 ; P?.6@3635,4770 cw(c3635,4721.72) 3669.14,4755.86 ; P?.6@3635,4770 cw(c3635,4721.72) 3669.14,4755.86 ; P?.6@3635,4770 cw(c3635,4721.72) 3669.14,4755.86 ; P?.6@3635,4790 ccw(c3669.24,4797.01) 3660.2,4763.25 ; P?.6@3635,4790 cw(c3627.99,4755.76) 3661.75,4764.8 ; P?.6@3635,4790 ccw(c3669.24,4797.01) 3660.2,4763.25 ; P?.6@3635,4790 cw(c3627.99,4755.76) 3661.75,4764.8 ; P?.6@3635,4790 ccw(c3669.24,4797.01) 3660.2,4763.25 ; P?.6@3635,4790 cw(c3627.99,4755.76) 3661.75,4764.8 ; P?.6@3635,4790 ccw(c3669.24,4797.01) 3660.2,4763.25 ; P?.6@3635,4790 cw(c3627.99,4755.76) 3661.75,4764.8 ; P?.6@3635,4790 ccw(c3669.24,4797.01) 3660.2,4763.25 ; P?.6@3635,4790 cw(c3627.99,4755.76) 3661.75,4764.8 ; P?.6@3635,4790 ccw(c3669.24,4797.01) 3660.2,4763.25 ; P?.6@3635,4790 cw(c3627.99,4755.76) 3661.75,4764.8 ; P?.6@3655,4790 ccw(c3703.28,4790) 3669.14,4755.86 ; P?.6@3655,4790 ccw(c3703.28,4790) 3669.14,4755.86 ; P?.6@3655,4790 ccw(c3703.28,4790) 3669.14,4755.86 ; P?.6@3655,4790 ccw(c3703.28,4790) 3669.14,4755.86
DB3: P?.8 STM32F103ZET6.65 | length 1509.7
  Top Layer w10: STM32F103ZET6.65@3748.31,4090 3748.31,4596.69 3691,4654 3691,4746 P?.8@3735,4790 ; 3700.86,4755.86 cw(c3735,4721.72) P?.8@3735,4770 ; 3700.86,4755.86 ccw(c3666.72,4790) P?.8@3715,4790 ; 3700.86,4755.86 ccw(c3666.72,4790) P?.8@3715,4790 ; 3700.86,4755.86 cw(c3735,4721.72) P?.8@3735,4770 ; 3700.86,4755.86 ccw(c3666.72,4790) P?.8@3715,4790 ; 3700.86,4755.86 cw(c3735,4721.72) P?.8@3735,4770 ; 3700.86,4755.86 ccw(c3666.72,4790) P?.8@3715,4790 ; 3700.86,4755.86 cw(c3735,4721.72) P?.8@3735,4770 ; 3708.25,4764.8 cw(c3742.01,4755.76) P?.8@3735,4790 ; 3708.25,4764.8 cw(c3742.01,4755.76) P?.8@3735,4790 ; 3708.25,4764.8 cw(c3742.01,4755.76) P?.8@3735,4790 ; 3708.25,4764.8 cw(c3742.01,4755.76) P?.8@3735,4790 ; 3708.25,4764.8 cw(c3742.01,4755.76) P?.8@3735,4790 ; 3708.25,4764.8 cw(c3742.01,4755.76) P?.8@3735,4790 ; 3709.8,4763.25 ccw(c3700.76,4797.01) P?.8@3735,4790 ; 3709.8,4763.25 ccw(c3700.76,4797.01) P?.8@3735,4790 ; 3709.8,4763.25 ccw(c3700.76,4797.01) P?.8@3735,4790 ; 3709.8,4763.25 ccw(c3700.76,4797.01) P?.8@3735,4790 ; 3709.8,4763.25 ccw(c3700.76,4797.01) P?.8@3735,4790 ; 3709.8,4763.25 ccw(c3700.76,4797.01) P?.8@3735,4790
DB4: P?.10 STM32F103ZET6.64 | length 2136.5
  Top Layer w10: STM32F103ZET6.64@3767.99,4090 3767.99,4672.08 3771,4675.09 3771,4711 3835,4775 P?.10@3835,4790 ; 3790.25,4730.25 ccw(c3730.5,4790) P?.10@3815,4790 ; 3790.25,4730.25 ccw(c3730.5,4790) P?.10@3815,4790 ; 3790.25,4730.25 ccw(c3730.5,4790) P?.10@3815,4790 ; 3790.25,4730.25 ccw(c3730.5,4790) P?.10@3815,4790 ; 3805.86,4755.91 cw(c3856.14,4742.43) P?.10@3835,4790 ; 3805.86,4755.91 cw(c3856.14,4742.43) P?.10@3835,4790 ; 3805.86,4755.91 cw(c3856.14,4742.43) P?.10@3835,4790 ; 3805.86,4755.91 cw(c3856.14,4742.43) P?.10@3835,4790 ; 3805.86,4755.91 cw(c3856.14,4742.43) P?.10@3835,4790 ; 3805.86,4755.91 cw(c3856.14,4742.43) P?.10@3835,4790 ; 3807.32,4747.32 ccw(c3764.64,4790) P?.10@3825,4790 ; 3807.32,4747.32 ccw(c3764.64,4790) P?.10@3825,4790 ; 3807.32,4747.32 ccw(c3764.64,4790) P?.10@3825,4790 ; 3807.32,4747.32 ccw(c3764.64,4790) P?.10@3825,4790 ; 3811.29,4776.14 cw(c3845.2,4767.06) P?.10@3830.94,4799.14 ; 3811.29,4776.14 cw(c3845.2,4767.06) P?.10@3830.94,4799.14 ; 3811.29,4776.14 cw(c3845.2,4767.06) P?.10@3830.94,4799.14 ; 3811.29,4776.14 cw(c3845.2,4767.06) P?.10@3830.94,4799.14 ; 3811.29,4776.14 cw(c3845.2,4767.06) P?.10@3830.94,4799.14 ; 3811.29,4776.14 cw(c3845.2,4767.06) P?.10@3830.94,4799.14 ; 3814.05,4773.06 cw(c3819.18,4766.72) P?.10@3823.76,4773.46 ; 3814.05,4773.06 ccw(c3808.93,4779.39) P?.10@3816.47,4782.46 ; 3814.05,4773.06 cw(c3819.18,4766.72) P?.10@3823.76,4773.46 ; 3814.05,4773.06 ccw(c3808.93,4779.39) P?.10@3816.47,4782.46 ; 3814.05,4773.06 cw(c3819.18,4766.72) P?.10@3823.76,4773.46 ; 3814.05,4773.06 ccw(c3808.93,4779.39) P?.10@3816.47,4782.46 ; 3814.05,4773.06 ccw(c3808.93,4779.39) P?.10@3816.47,4782.46 ; 3814.05,4773.06 cw(c3819.18,4766.72) P?.10@3823.76,4773.46 ; 3817,4760.13 cw(c3844.42,4752.78) P?.10@3837.45,4780.31 ; 3817,4760.13 cw(c3844.42,4752.78) P?.10@3837.45,4780.31 ; 3817,4760.13 cw(c3844.42,4752.78) P?.10@3837.45,4780.31 ; 3817,4760.13 cw(c3844.42,4752.78) P?.10@3837.45,4780.31 ; 3817,4760.13 cw(c3844.42,4752.78) P?.10@3837.45,4780.31 ; 3817,4760.13 cw(c3844.42,4752.78) P?.10@3837.45,4780.31 ; P?.10@3817.68,4780 cw(c3804.42,4772.35) 3819.21,4768.39 ; P?.10@3817.68,4780 cw(c3804.42,4772.35) 3819.21,4768.39 ; P?.10@3817.68,4780 cw(c3804.42,4772.35) 3819.21,4768.39 ; P?.10@3817.68,4780 cw(c3804.42,4772.35) 3819.21,4768.39 ; P?.10@3817.68,4780 cw(c3804.42,4772.35) 3819.21,4768.39 ; P?.10@3817.68,4780 cw(c3804.42,4772.35) 3819.21,4768.39 ; 3824.39,4764.39 ccw(c3798.79,4790) P?.10@3835,4790 ; 3824.39,4764.39 ccw(c3798.79,4790) P?.10@3835,4790 ; 3824.39,4764.39 ccw(c3798.79,4790) P?.10@3835,4790 ; 3824.39,4764.39 ccw(c3798.79,4790) P?.10@3835,4790 ; 3826.46,4766.46 cw(c3835,4757.93) P?.10@3835,4770 ; 3826.46,4766.46 cw(c3835,4757.93) P?.10@3835,4770 ; 3826.46,4766.46 cw(c3835,4757.93) P?.10@3835,4770 ; 3826.46,4766.46 cw(c3835,4757.93) P?.10@3835,4770
DB5: P?.12 STM32F103ZET6.63 | length 1094.2
  Top Layer w10: STM32F103ZET6.63@3787.68,4090 3787.68,4693.59 3820.09,4726 3821.91,4726 3885.91,4790 P?.12@3935,4790 ; 3886.72,4790 cw(c3886.72,4741.72) P?.12@3920.86,4775.86 ; 3886.72,4790 ccw(c3886.72,4838.28) P?.12@3920.86,4804.14 ; 3886.72,4790 ccw(c3886.72,4838.28) P?.12@3920.86,4804.14 ; 3886.72,4790 cw(c3886.72,4741.72) P?.12@3920.86,4775.86 ; 3886.72,4790 ccw(c3886.72,4838.28) P?.12@3920.86,4804.14 ; 3886.72,4790 cw(c3886.72,4741.72) P?.12@3920.86,4775.86 ; 3886.72,4790 ccw(c3886.72,4838.28) P?.12@3920.86,4804.14 ; 3886.72,4790 cw(c3886.72,4741.72) P?.12@3920.86,4775.86
DB6: P?.14 STM32F103ZET6.60 | length 1545.7
  Top Layer w10: STM32F103ZET6.60@3846.73,4090 3846.73,4531.73 3985,4670 3985,4740 P?.14@4035,4790 ; 4000.86,4755.86 cw(c4035,4721.72) P?.14@4035,4770 ; 4000.86,4755.86 ccw(c3966.72,4790) P?.14@4015,4790 ; 4000.86,4755.86 ccw(c3966.72,4790) P?.14@4015,4790 ; 4000.86,4755.86 cw(c4035,4721.72) P?.14@4035,4770 ; 4000.86,4755.86 ccw(c3966.72,4790) P?.14@4015,4790 ; 4000.86,4755.86 cw(c4035,4721.72) P?.14@4035,4770 ; 4000.86,4755.86 ccw(c3966.72,4790) P?.14@4015,4790 ; 4000.86,4755.86 cw(c4035,4721.72) P?.14@4035,4770 ; 4008.25,4764.8 cw(c4042.01,4755.76) P?.14@4035,4790 ; 4008.25,4764.8 cw(c4042.01,4755.76) P?.14@4035,4790 ; 4008.25,4764.8 cw(c4042.01,4755.76) P?.14@4035,4790 ; 4008.25,4764.8 cw(c4042.01,4755.76) P?.14@4035,4790 ; 4008.25,4764.8 cw(c4042.01,4755.76) P?.14@4035,4790 ; 4008.25,4764.8 cw(c4042.01,4755.76) P?.14@4035,4790 ; 4009.8,4763.25 ccw(c4000.76,4797.01) P?.14@4035,4790 ; 4009.8,4763.25 ccw(c4000.76,4797.01) P?.14@4035,4790 ; 4009.8,4763.25 ccw(c4000.76,4797.01) P?.14@4035,4790 ; 4009.8,4763.25 ccw(c4000.76,4797.01) P?.14@4035,4790 ; 4009.8,4763.25 ccw(c4000.76,4797.01) P?.14@4035,4790 ; 4009.8,4763.25 ccw(c4000.76,4797.01) P?.14@4035,4790
DB7: P?.16 STM32F103ZET6.58 | length 1570.8
  Top Layer w10: STM32F103ZET6.58@3886.1,4090 3886.1,4481.1 4085,4680 4085,4740 P?.16@4135,4790 ; 4100.86,4755.86 cw(c4135,4721.72) P?.16@4135,4770 ; 4100.86,4755.86 ccw(c4066.72,4790) P?.16@4115,4790 ; 4100.86,4755.86 ccw(c4066.72,4790) P?.16@4115,4790 ; 4100.86,4755.86 cw(c4135,4721.72) P?.16@4135,4770 ; 4100.86,4755.86 ccw(c4066.72,4790) P?.16@4115,4790 ; 4100.86,4755.86 cw(c4135,4721.72) P?.16@4135,4770 ; 4100.86,4755.86 ccw(c4066.72,4790) P?.16@4115,4790 ; 4100.86,4755.86 cw(c4135,4721.72) P?.16@4135,4770 ; 4108.25,4764.8 cw(c4142.01,4755.76) P?.16@4135,4790 ; 4108.25,4764.8 cw(c4142.01,4755.76) P?.16@4135,4790 ; 4108.25,4764.8 cw(c4142.01,4755.76) P?.16@4135,4790 ; 4108.25,4764.8 cw(c4142.01,4755.76) P?.16@4135,4790 ; 4108.25,4764.8 cw(c4142.01,4755.76) P?.16@4135,4790 ; 4108.25,4764.8 cw(c4142.01,4755.76) P?.16@4135,4790 ; 4109.8,4763.25 ccw(c4100.76,4797.01) P?.16@4135,4790 ; 4109.8,4763.25 ccw(c4100.76,4797.01) P?.16@4135,4790 ; 4109.8,4763.25 ccw(c4100.76,4797.01) P?.16@4135,4790 ; 4109.8,4763.25 ccw(c4100.76,4797.01) P?.16@4135,4790 ; 4109.8,4763.25 ccw(c4100.76,4797.01) P?.16@4135,4790 ; 4109.8,4763.25 ccw(c4100.76,4797.01) P?.16@4135,4790
DB8: P?.13 STM32F103ZET6.59 | length 1437.6
  Top Layer w10: STM32F103ZET6.59@3866.42,4090 3866.42,4521.42 P?.13@4035,4690 ; 4000.86,4655.86 cw(c4035,4621.72) P?.13@4035,4670 ; 4000.86,4655.86 ccw(c3966.72,4690) P?.13@4015,4690 ; 4000.86,4655.86 ccw(c3966.72,4690) P?.13@4015,4690 ; 4000.86,4655.86 cw(c4035,4621.72) P?.13@4035,4670 ; 4000.86,4655.86 ccw(c3966.72,4690) P?.13@4015,4690 ; 4000.86,4655.86 cw(c4035,4621.72) P?.13@4035,4670 ; 4000.86,4655.86 ccw(c3966.72,4690) P?.13@4015,4690 ; 4000.86,4655.86 cw(c4035,4621.72) P?.13@4035,4670 ; 4008.25,4664.8 cw(c4042.01,4655.76) P?.13@4035,4690 ; 4008.25,4664.8 cw(c4042.01,4655.76) P?.13@4035,4690 ; 4008.25,4664.8 cw(c4042.01,4655.76) P?.13@4035,4690 ; 4008.25,4664.8 cw(c4042.01,4655.76) P?.13@4035,4690 ; 4008.25,4664.8 cw(c4042.01,4655.76) P?.13@4035,4690 ; 4008.25,4664.8 cw(c4042.01,4655.76) P?.13@4035,4690 ; 4009.8,4663.25 ccw(c4000.76,4697.01) P?.13@4035,4690 ; 4009.8,4663.25 ccw(c4000.76,4697.01) P?.13@4035,4690 ; 4009.8,4663.25 ccw(c4000.76,4697.01) P?.13@4035,4690 ; 4009.8,4663.25 ccw(c4000.76,4697.01) P?.13@4035,4690 ; 4009.8,4663.25 ccw(c4000.76,4697.01) P?.13@4035,4690 ; 4009.8,4663.25 ccw(c4000.76,4697.01) P?.13@4035,4690
DB9: P?.15 STM32F103ZET6.57 | length 1462.7
  Top Layer w10: STM32F103ZET6.57@3905.79,4090 3905.79,4460.79 P?.15@4135,4690 ; 4100.86,4655.86 cw(c4135,4621.72) P?.15@4135,4670 ; 4100.86,4655.86 ccw(c4066.72,4690) P?.15@4115,4690 ; 4100.86,4655.86 ccw(c4066.72,4690) P?.15@4115,4690 ; 4100.86,4655.86 cw(c4135,4621.72) P?.15@4135,4670 ; 4100.86,4655.86 ccw(c4066.72,4690) P?.15@4115,4690 ; 4100.86,4655.86 cw(c4135,4621.72) P?.15@4135,4670 ; 4100.86,4655.86 ccw(c4066.72,4690) P?.15@4115,4690 ; 4100.86,4655.86 cw(c4135,4621.72) P?.15@4135,4670 ; 4108.25,4664.8 cw(c4142.01,4655.76) P?.15@4135,4690 ; 4108.25,4664.8 cw(c4142.01,4655.76) P?.15@4135,4690 ; 4108.25,4664.8 cw(c4142.01,4655.76) P?.15@4135,4690 ; 4108.25,4664.8 cw(c4142.01,4655.76) P?.15@4135,4690 ; 4108.25,4664.8 cw(c4142.01,4655.76) P?.15@4135,4690 ; 4108.25,4664.8 cw(c4142.01,4655.76) P?.15@4135,4690 ; 4109.8,4663.25 ccw(c4100.76,4697.01) P?.15@4135,4690 ; 4109.8,4663.25 ccw(c4100.76,4697.01) P?.15@4135,4690 ; 4109.8,4663.25 ccw(c4100.76,4697.01) P?.15@4135,4690 ; 4109.8,4663.25 ccw(c4100.76,4697.01) P?.15@4135,4690 ; 4109.8,4663.25 ccw(c4100.76,4697.01) P?.15@4135,4690 ; 4109.8,4663.25 ccw(c4100.76,4697.01) P?.15@4135,4690
DB10: P?.17 STM32F103ZET6.56 | length 1519.4
  Top Layer w10: STM32F103ZET6.56@3925.47,4090 3925.47,4420.47 4135,4630 4175,4630 P?.17@4235,4690 ; 4200.86,4655.86 cw(c4235,4621.72) P?.17@4235,4670 ; 4200.86,4655.86 ccw(c4166.72,4690) P?.17@4215,4690 ; 4200.86,4655.86 ccw(c4166.72,4690) P?.17@4215,4690 ; 4200.86,4655.86 cw(c4235,4621.72) P?.17@4235,4670 ; 4200.86,4655.86 ccw(c4166.72,4690) P?.17@4215,4690 ; 4200.86,4655.86 cw(c4235,4621.72) P?.17@4235,4670 ; 4200.86,4655.86 ccw(c4166.72,4690) P?.17@4215,4690 ; 4200.86,4655.86 cw(c4235,4621.72) P?.17@4235,4670 ; 4208.25,4664.8 cw(c4242.01,4655.76) P?.17@4235,4690 ; 4208.25,4664.8 cw(c4242.01,4655.76) P?.17@4235,4690 ; 4208.25,4664.8 cw(c4242.01,4655.76) P?.17@4235,4690 ; 4208.25,4664.8 cw(c4242.01,4655.76) P?.17@4235,4690 ; 4208.25,4664.8 cw(c4242.01,4655.76) P?.17@4235,4690 ; 4208.25,4664.8 cw(c4242.01,4655.76) P?.17@4235,4690 ; 4209.8,4663.25 ccw(c4200.76,4697.01) P?.17@4235,4690 ; 4209.8,4663.25 ccw(c4200.76,4697.01) P?.17@4235,4690 ; 4209.8,4663.25 ccw(c4200.76,4697.01) P?.17@4235,4690 ; 4209.8,4663.25 ccw(c4200.76,4697.01) P?.17@4235,4690 ; 4209.8,4663.25 ccw(c4200.76,4697.01) P?.17@4235,4690 ; 4209.8,4663.25 ccw(c4200.76,4697.01) P?.17@4235,4690
DB11: P?.19 STM32F103ZET6.55 | length 1891.6
  Top Layer w10: STM32F103ZET6.55@3945.16,4090 3945.16,4410.16 4149,4614 4264,4614 4335,4685 P?.19@4335,4690 ; 4297.32,4647.32 ccw(c4254.64,4690) P?.19@4315,4690 ; 4297.32,4647.32 ccw(c4254.64,4690) P?.19@4315,4690 ; 4297.32,4647.32 ccw(c4254.64,4690) P?.19@4315,4690 ; 4297.32,4647.32 ccw(c4254.64,4690) P?.19@4315,4690 ; 4307.45,4661.84 cw(c4346.25,4651.44) P?.19@4335,4690 ; 4307.45,4661.84 cw(c4346.25,4651.44) P?.19@4335,4690 ; 4307.45,4661.84 cw(c4346.25,4651.44) P?.19@4335,4690 ; 4307.45,4661.84 cw(c4346.25,4651.44) P?.19@4335,4690 ; 4307.45,4661.84 cw(c4346.25,4651.44) P?.19@4335,4690 ; 4307.45,4661.84 cw(c4346.25,4651.44) P?.19@4335,4690 ; 4309.39,4659.39 cw(c4335,4633.79) P?.19@4335,4670 ; 4309.39,4659.39 cw(c4335,4633.79) P?.19@4335,4670 ; 4309.39,4659.39 cw(c4335,4633.79) P?.19@4335,4670 ; 4309.39,4659.39 cw(c4335,4633.79) P?.19@4335,4670 ; 4312.05,4679 cw(c4340.43,4671.4) P?.19@4332.2,4699.6 ; 4312.05,4679 cw(c4340.43,4671.4) P?.19@4332.2,4699.6 ; 4312.05,4679 cw(c4340.43,4671.4) P?.19@4332.2,4699.6 ; 4312.05,4679 cw(c4340.43,4671.4) P?.19@4332.2,4699.6 ; 4312.05,4679 cw(c4340.43,4671.4) P?.19@4332.2,4699.6 ; 4312.05,4679 cw(c4340.43,4671.4) P?.19@4332.2,4699.6 ; 4312.77,4664.04 ccw(c4304.94,4693.24) P?.19@4335,4690 ; 4312.77,4664.04 ccw(c4304.94,4693.24) P?.19@4335,4690 ; 4312.77,4664.04 ccw(c4304.94,4693.24) P?.19@4335,4690 ; 4312.77,4664.04 ccw(c4304.94,4693.24) P?.19@4335,4690 ; 4312.77,4664.04 ccw(c4304.94,4693.24) P?.19@4335,4690 ; 4312.77,4664.04 ccw(c4304.94,4693.24) P?.19@4335,4690 ; 4314.39,4664.39 ccw(c4288.79,4690) P?.19@4325,4690 ; 4314.39,4664.39 ccw(c4288.79,4690) P?.19@4325,4690 ; 4314.39,4664.39 ccw(c4288.79,4690) P?.19@4325,4690 ; 4314.39,4664.39 ccw(c4288.79,4690) P?.19@4325,4690
DB12: P?.21 STM32F103ZET6.54 | length 1125.7
  Top Layer w10: STM32F103ZET6.54@3964.84,4090 3964.84,4404.84 4155,4595 4300,4595 4395,4690 ; P?.21@4435,4690 4395,4690 ; 4395,4690 cw(c4395,4660) P?.21@4419,4678 ; 4395,4690 ccw(c4395,4720) P?.21@4419,4702 ; 4395,4690 ccw(c4395,4720) P?.21@4419,4702 ; 4395,4690 cw(c4395,4660) P?.21@4419,4678 ; 4395,4690 ccw(c4395,4720) P?.21@4419,4702 ; 4395,4690 cw(c4395,4660) P?.21@4419,4678 ; 4395,4690 ccw(c4395,4720) P?.21@4419,4702 ; 4395,4690 cw(c4395,4660) P?.21@4419,4678
DB13: P?.23 STM32F103ZET6.53 | length 1280.8
  Top Layer w10: STM32F103ZET6.53@3984.53,4090 3984.53,4394.53 4169,4579 4374.91,4579 4485.91,4690 P?.23@4535,4690 ; 4486.72,4690 cw(c4486.72,4641.72) P?.23@4520.86,4675.86 ; 4486.72,4690 ccw(c4486.72,4738.28) P?.23@4520.86,4704.14 ; 4486.72,4690 ccw(c4486.72,4738.28) P?.23@4520.86,4704.14 ; 4486.72,4690 cw(c4486.72,4641.72) P?.23@4520.86,4675.86 ; 4486.72,4690 ccw(c4486.72,4738.28) P?.23@4520.86,4704.14 ; 4486.72,4690 cw(c4486.72,4641.72) P?.23@4520.86,4675.86 ; 4486.72,4690 ccw(c4486.72,4738.28) P?.23@4520.86,4704.14 ; 4486.72,4690 cw(c4486.72,4641.72) P?.23@4520.86,4675.86
DB14: P?.25 STM32F103ZET6.50 | length 1797.2
  Top Layer w10: STM32F103ZET6.50@4043.58,4090 4043.58,4413.58 4190,4560 4505,4560 P?.25@4635,4690 ; 4600.86,4655.86 cw(c4635,4621.72) P?.25@4635,4670 ; 4600.86,4655.86 ccw(c4566.72,4690) P?.25@4615,4690 ; 4600.86,4655.86 ccw(c4566.72,4690) P?.25@4615,4690 ; 4600.86,4655.86 cw(c4635,4621.72) P?.25@4635,4670 ; 4600.86,4655.86 ccw(c4566.72,4690) P?.25@4615,4690 ; 4600.86,4655.86 cw(c4635,4621.72) P?.25@4635,4670 ; 4600.86,4655.86 ccw(c4566.72,4690) P?.25@4615,4690 ; 4600.86,4655.86 cw(c4635,4621.72) P?.25@4635,4670 ; 4608.25,4664.8 cw(c4642.01,4655.76) P?.25@4635,4690 ; 4608.25,4664.8 cw(c4642.01,4655.76) P?.25@4635,4690 ; 4608.25,4664.8 cw(c4642.01,4655.76) P?.25@4635,4690 ; 4608.25,4664.8 cw(c4642.01,4655.76) P?.25@4635,4690 ; 4608.25,4664.8 cw(c4642.01,4655.76) P?.25@4635,4690 ; 4608.25,4664.8 cw(c4642.01,4655.76) P?.25@4635,4690 ; 4609.8,4663.25 ccw(c4600.76,4697.01) P?.25@4635,4690 ; 4609.8,4663.25 ccw(c4600.76,4697.01) P?.25@4635,4690 ; 4609.8,4663.25 ccw(c4600.76,4697.01) P?.25@4635,4690 ; 4609.8,4663.25 ccw(c4600.76,4697.01) P?.25@4635,4690 ; 4609.8,4663.25 ccw(c4600.76,4697.01) P?.25@4635,4690 ; 4609.8,4663.25 ccw(c4600.76,4697.01) P?.25@4635,4690
DB15: P?.27 STM32F103ZET6.49 | length 1369.1
  Top Layer w10: STM32F103ZET6.49@4063.27,4090 4063.27,4338.27 4269,4544 4539.91,4544 4685.91,4690 P?.27@4735,4690 ; 4686.72,4690 cw(c4686.72,4641.72) P?.27@4720.86,4675.86 ; 4686.72,4690 ccw(c4686.72,4738.28) P?.27@4720.86,4704.14 ; 4686.72,4690 ccw(c4686.72,4738.28) P?.27@4720.86,4704.14 ; 4686.72,4690 cw(c4686.72,4641.72) P?.27@4720.86,4675.86 ; 4686.72,4690 ccw(c4686.72,4738.28) P?.27@4720.86,4704.14 ; 4686.72,4690 cw(c4686.72,4641.72) P?.27@4720.86,4675.86 ; 4686.72,4690 ccw(c4686.72,4738.28) P?.27@4720.86,4704.14 ; 4686.72,4690 cw(c4686.72,4641.72) P?.27@4720.86,4675.86
F_CS: P?.31 STM32F103ZET6.29 | length 1163.7
  Top Layer w10: STM32F103ZET6.29@4375,3876.69 4421.69,3876.69 4505,3960 4505,4232.37 4935,4662.37 ; P?.31@4935,4690 4935,4662.37 ; P?.31@4928.75,4671 cw(c4925.92,4662.37) 4935,4662.37 ; P?.31@4928.75,4671 cw(c4925.92,4662.37) 4935,4662.37 ; P?.31@4928.75,4671 cw(c4925.92,4662.37) 4935,4662.37 ; P?.31@4928.75,4671 cw(c4925.92,4662.37) 4935,4662.37 ; 4935,4662.37 cw(c4944.08,4662.37) P?.31@4941.25,4671 ; 4935,4662.37 cw(c4944.08,4662.37) P?.31@4941.25,4671 ; 4935,4662.37 cw(c4944.08,4662.37) P?.31@4941.25,4671 ; 4935,4662.37 cw(c4944.08,4662.37) P?.31@4941.25,4671